# Altium PCB PCB2.PcbDoc
Units mil, origin at the board's own origin, x right, y up, seen from the top; angles counter-clockwise.
Board outline 6000 x 4000 mil, 2 copper layers (Top Layer, Bottom Layer); 5 components, 14 nets, 54 pads, 0 vias.
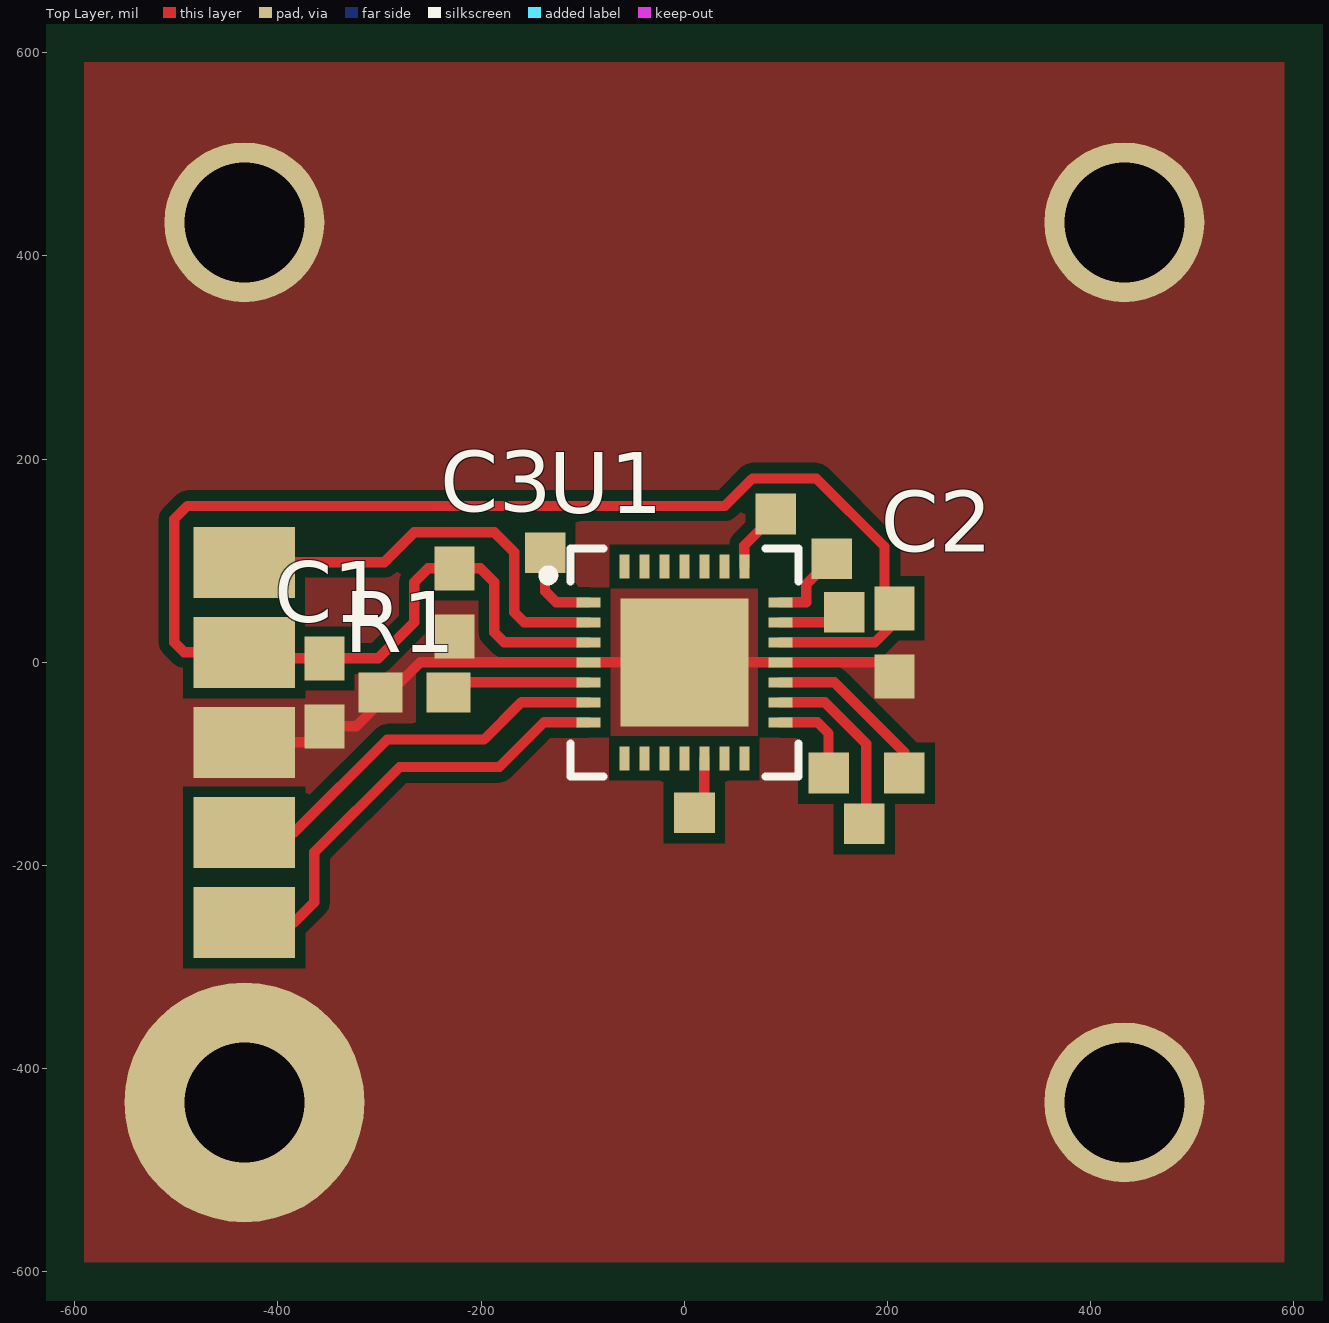
[diagram p0: Top Layer view]
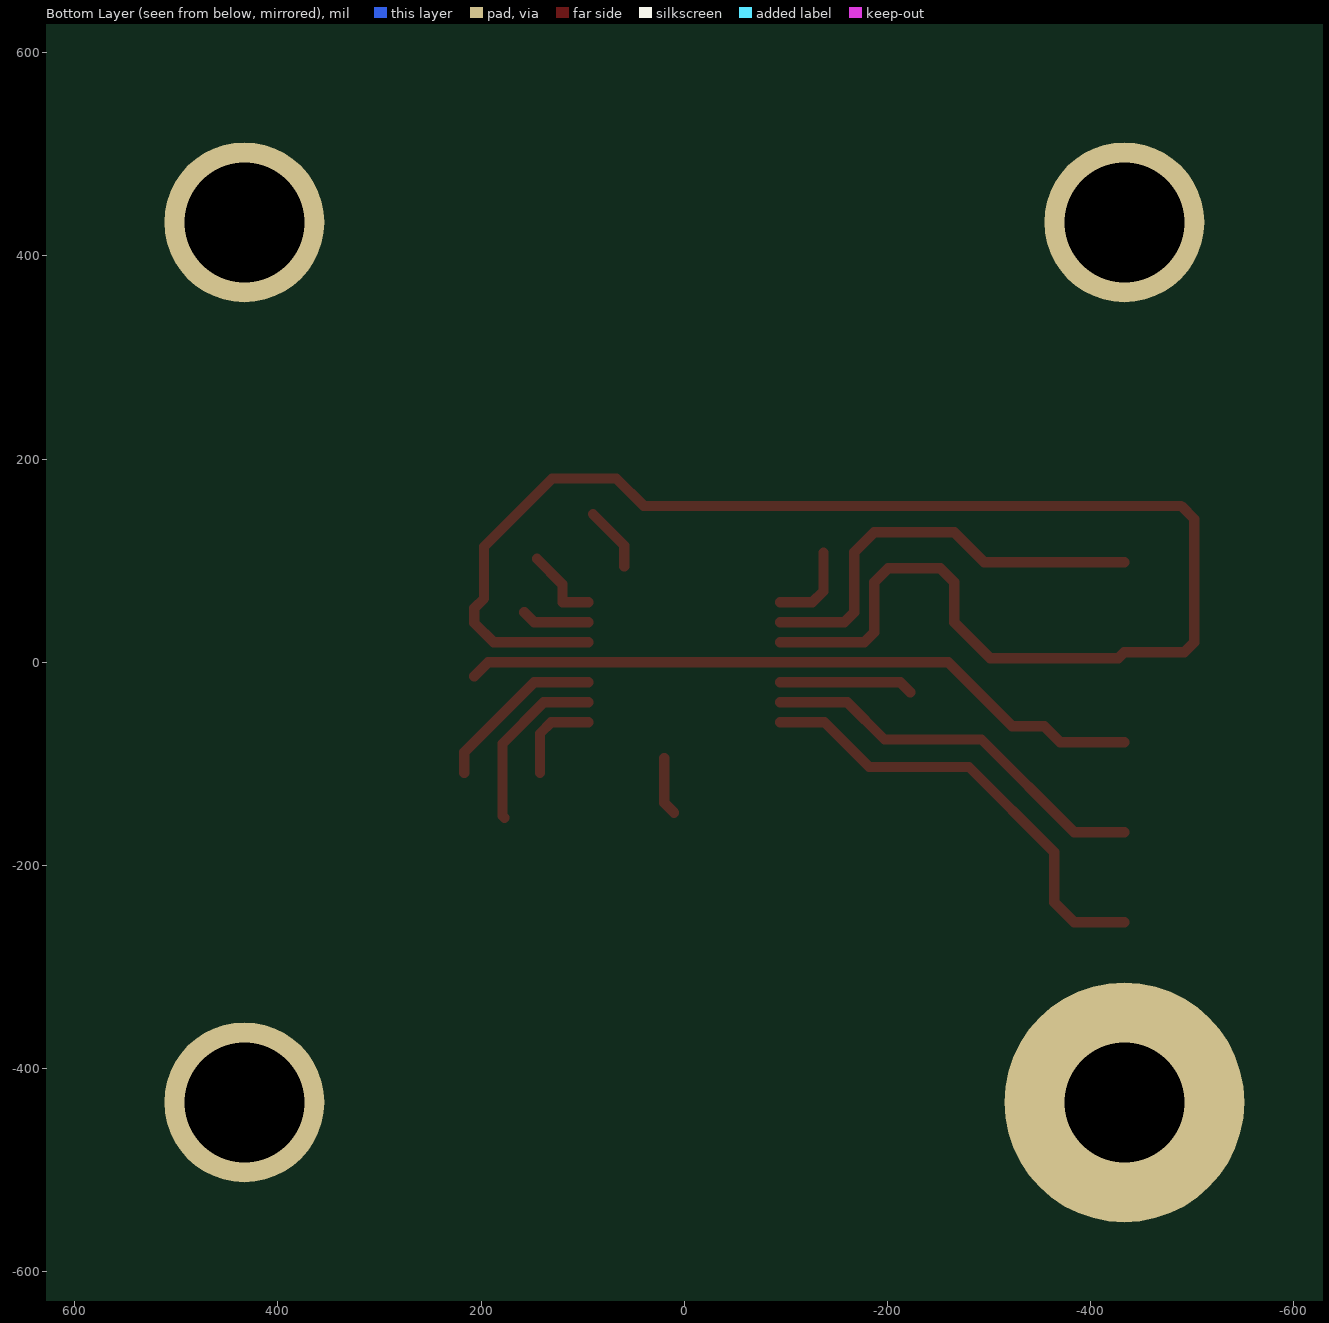
[diagram p1: Bottom Layer view, seen from below]

## Layer stack, top to bottom
Top Solder: solder mask 0.4, Solder Resist, Dk 3.5
Top Layer: signal copper 1.4
Dielectric 1: dielectric 12.6, FR-4, Dk 4.8
Bottom Layer: signal copper 1.4
Bottom Solder: solder mask 0.4, Solder Resist, Dk 3.5

## Board outline
-3527.56,-1165.35 2472.44,-1165.35 2472.44,2834.65 -3527.56,2834.65

## Design rules (kind name [scope] priority, off if disabled: settings)
Clearance [All] p1: gap=4 except(10: Arc-Poly Track-Poly SMDPad-Poly THPad-Poly Via-Poly Fill-Poly Poly-Poly)
ComponentClearance [All] p1: gap=2 collisioncheckmode=3 verticalgap=10 showdistances=FALSE
PlaneConnect [All] p1: planeconnectstyle=Direct reliefexpansion=20 reliefentries=4 reliefconductorwidth=10 reliefairgap=10
PolygonConnect [All] p1: connectstyle=Direct reliefconductorwidth=10 reliefentries=4 polygonreliefangle="90 Angle" airgapwidth=10
RoomDefinition Sheet2 [InComponentClass('Sheet2')] p1: confinementstyle=ConfineOut formatcopy=TRUE lockcomponents=FALSE outline 2517.44,-1105.35 3047.44,-1105.35 3047.44,-535.35 2517.44,-535.35
RoutingVias [All] p1: holewidth=28 width=50 viastyle="Through Hole" minholewidth=28 minwidth=50 maxholewidth=28 maxwidth=50
SolderMaskExpansion [All] p1: expansion=4
Width [All] p1: maxlimit=10 minlimit=10 preferedwidth=10
28 further rules are at their usual default settings.

## Components (designator, comment, footprint, x,y, rotation, side; value= is the part's Value field where it differs from the comment)
C1 "Cap" ERA-0603 -354.33,-29.53 r90 top
C2 "Cap" ERA-0603 206.69,19.68 r90 top
C3 "Cap" ERA-0603 -226.38,59.06 r90 top
R1 "Res1" ERA-0603 -265.75,-29.53 r180 top
U1 "IC_MH" QFN28-2 0,0 r0 top

## Footprints (in the part's own frame and the unit in brackets; to place one, negate y for a bottom-side part, rotate by r counter-clockwise, add the part's x,y. Pads: shape width x height; smd on the part's side, far side on the other; paste and mask are expansions set on the pad)
ERA-0603 [mm] "Chip Resistor; Body 1.6 x 0.8 mm (LxW typ)"
  rect 1.1x1 smd: 1(-0.85,0) 2(0.85,0)
QFN28-2 [mm]
  rect 0.6x0.25 smd paste-0.125 mask+0.051: 1(-2.4,1.5) 2(-2.4,1) 3(-2.4,0.5) 4(-2.4,0) 5(-2.4,-0.5) 6(-2.4,-1) 7(-2.4,-1.5) 15(2.4,-1.5) 16(2.4,-1) 17(2.4,-0.5) 18(2.4,0) 19(2.4,0.5) 20(2.4,1) 21(2.4,1.5)
  rect 0.25x0.6 smd paste-0.125 mask+0.051: 8(-1.5,-2.4) 9(-1,-2.4) 10(-0.5,-2.4) 11(0,-2.4) 12(0.5,-2.4) 13(1,-2.4) 14(1.5,-2.4) 22(1.5,2.4) 23(1,2.4) 24(0.5,2.4) 25(0,2.4) 26(-0.5,2.4) 27(-1,2.4) 28(-1.5,2.4)
  rect 3.2x3.2 smd paste-1.8 mask+0.051: 29(0,0)
  Top Layer lines w0.254: -1.5,0 -0.5,0 0,0 0.5,0 1.5,0
  silkscreen extent -3.52,-2.85 2.85,2.85, body extent -2.55,-2.55 2.55,2.55, height 1

## Part data
C1 C2 C3: "Capacitor"
R1: "Resistor"

## Free pads (board coordinates)
  round 236.22 hole 118.11: 0(-433.07,-433.07)
  round 157.48 hole 118.11: 0(-433.07,433.07) 0(433.07,-433.07) 0(433.07,433.07)
  rect 100x70 smd: 1(-433.07,-255.91) 1(-433.07,-167.32) 1(-433.07,-78.74) 1(-433.07,9.84) 1(-433.07,98.43)
  rect 40x40 smd: 4(-137,108) 4(10,-148) 4(90,146) 4(142,-109) 4(145,102) 4(157.48,49.21) 4(177,-159) 4(216.54,-109)

## Nets (pads, with @x,y where several pads share a name; then routed paths per layer and width w, separated by ;. In a path a pad name is that pad's centre, name@x,y a point inside that pad or via, vN(x,y) a via of type N, cw(c..) or ccw(c..) an arc to the next point about the centre after c; other vN are vias at no path point)
A: pad.4@142,-109 U1.15 | length 91
  Top Layer w10: U1.15 131.06,-59.06 142,-70 pad.4@142,-109
B: pad.4@177,-159 U1.16 | length 175.2
  Top Layer w10: U1.16 138.37,-39.37 179,-80 179,-151 pad.4@177,-153
ERR: pad.1@-433.07,98.43 U1.2 | length 422.1
  Top Layer w10: pad.1@-433.07,98.43 -295.28,98.43 -265.75,127.95 -187.01,127.95 -167.32,108.27 -167.32,49.21 -157.48,39.37 U1.2
GND: C1.1 C2.1 C3.1 pad.0 pad.1@-433.07,-78.74 R1.2 U1.4 U1.18 U1.29 | length 678.1
  Top Layer w10: pad.1@-433.07,-78.74 -370.08,-78.74 C1.1 -322.83,-62.99 -259.84,0 U1.4 -59.06,0 -19.69,0 U1.29 19.68,0 59.06,0 U1.18 192.91,0 C2.1
MA: pad.1@-433.07,-167.32 U1.6 | length 391.6
  Top Layer w10: pad.1@-433.07,-167.32 -383.86,-167.32 -292.54,-76 -197,-76 -160.37,-39.37 U1.6
NetR1_1: R1.1 U1.5 | length 132
  Top Layer w10: R1.1@-222.44,-29.53 -212.6,-19.68 U1.5
PTE: pad.4@-137,108 U1.1 | length 85
  Top Layer w10: pad.4@-137,108 -137,70 -126.06,59.06 U1.1
SLO: pad.1@-433.07,-255.91 U1.7 | length 448.9
  Top Layer w10: pad.1@-433.07,-255.91 -383.86,-255.91 -364.17,-236.22 -364.17,-187.01 -280.17,-103 -182,-103 -138.06,-59.06 U1.7
U: pad.4@157.48,49.21 U1.20 | length 67.1
  Top Layer w10: U1.20 147.64,39.37 pad.4@157.48,49.21
V: pad.4@145,102 U1.21 | length 78.8
  Top Layer w10: U1.21 120,59.06 120,77 pad.4@145,102
VCC: C1.2 C2.2 C3.2 pad.1@-433.07,9.84 U1.3 U1.19 | length 1596.8
  Top Layer w10: U1.3 -177.17,19.69 -187.01,29.53 -187.01,78.74 -200.79,92.52 C3.2 -251.97,92.52 -265.75,78.74 -265.75,39.37 -301.18,3.94 C1.2 -427.17,3.94 -433.07,9.84 -492.13,9.84 -501.97,19.68 -501.97,141 -488.97,154 40,154 67,181 130,181 197,114 197,62.84 C2.2 206.69,38.69 187.69,19.69 U1.19
VZAP: pad.4@10,-148 U1.12 | length 57.5
  Top Layer w10: pad.4@10,-148 19.68,-138.32 U1.12
W: pad.4@90,146 U1.22 | length 64.3
  Top Layer w10: U1.22 59.06,115.06 pad.4@90,146
Z: pad.4@216.54,-109 U1.17 | length 171
  Top Layer w10: U1.17 147.68,-19.68 216.54,-88.54 pad.4@216.54,-109
pads on no net: U1.8 U1.9 U1.10 U1.11 U1.13 U1.14 U1.23 U1.24 U1.25 U1.26 U1.27 U1.28

## Polygon pours and split planes (outlines as drawn)
GND on Top Layer "Top Layer-No Net" (solid, pour order 0): -590.55,-590.55 -590.55,590.55 590.55,590.55 590.55,-590.55 -590.55,-590.55